# Altium PCB JacdacRHTemp 18.PcbDoc
Units mm, origin at the board's own origin, x right, y up, seen from the top; angles counter-clockwise.
Board outline 10.15 x 28.22 mm, 2 copper layers (Top Layer, Bottom Layer), stack 1.525 mm thick; 25 components, 17 nets, 89 pads, 12 vias.
Unrouted connection lines stored in the file: 14.
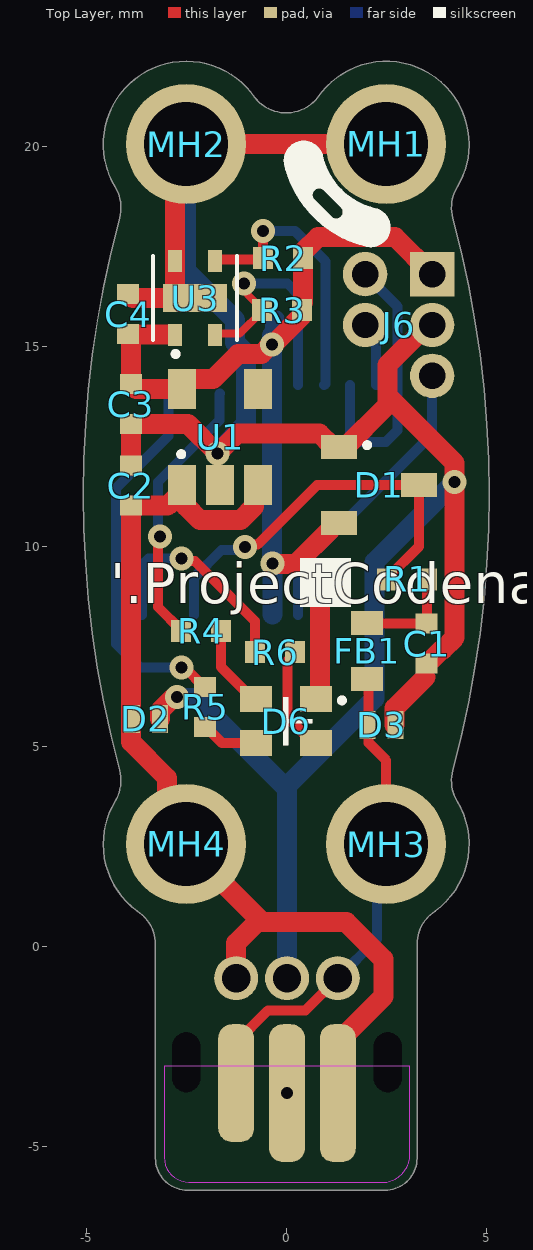
[diagram p0: Top Layer view]
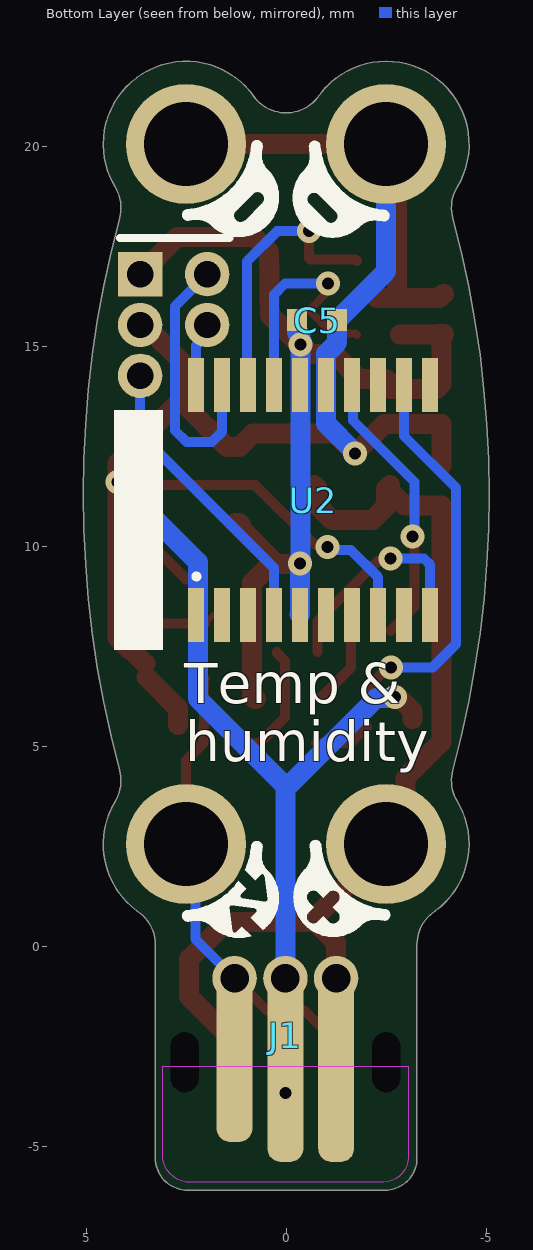
[diagram p1: Bottom Layer view, seen from below]

## Layer stack, top to bottom
Top Solder: solder mask 0.0102, Solder Resist, Dk 3.5
Top Layer: signal copper 0.0356
Dielectric 1: core 1.454, FR-4, Dk 4.2
Bottom Layer: signal copper 0.0356
Bottom Solder: solder mask 0.0102, Solder Resist, Dk 3.5

## Board outline
-4.574,2.554 ccw(c-2.493,2.554) -3.725,0.877 cw(c-4.268,0.04) -3.27,0.039 -3.27,-5.3 ccw(c-2.471,-5.301) -2.47,-6.1 2.47,-6.1 ccw(c2.471,-5.301) 3.27,-5.3 3.27,0.039 cw(c4.268,0.04) 3.725,0.877 ccw(c2.5,2.549) 4.275,3.62 cw(c5.132,4.136) 4.166,4.394 ccw(c-21.654,11.3) 4.166,18.205 cw(c5.132,18.463) 4.275,18.979 ccw(c2.5,20.05) 4.573,20.02 4.573,20.05 ccw(c2.501,20.051) 0.783,21.21 cw(c0.001,21.833) -0.783,21.212 ccw(c-2.5,20.05) -2.487,22.123 -2.5,22.123 ccw(c-2.5,20.049) -3.334,21.948 ccw(c-2.5,20.05) -4.275,18.98 cw(c-5.132,18.464) -4.166,18.205 ccw(c21.634,11.3) -4.167,4.398 cw(c-5.133,4.14) -4.276,3.624 ccw(c-2.497,2.552)

## Design rules (kind name [scope] priority, off if disabled: settings)
AssemblyTestPointUsage [All] p1: valid=2
BoardOutlineClearance [All] p1: gap=0.3 ignorepadtopadclearanceinfootprint=FALSE except(0: Arc-SplitContinuation Track-SplitContinuation SMDPad-OutlineEdge SMDPad-SplitContinuation THPad-OutlineEdge THPad-SplitContinuation Via-SplitContinuation Fill-SplitContinuation Poly-SplitContinuation Region-OutlineEdge Region-SplitContinuation Text-SplitContinuation; 0.2: Track-OutlineEdge Text-OutlineEdge)
Clearance [All] p1: gap=0.125 ignorepadtopadclearanceinfootprint=FALSE except(0: Arc-Hole Track-Hole SMDPad-Hole THPad-Hole Via-Hole Fill-Hole Poly-Hole Region-Hole Text-Hole)
ComponentClearance [All] p1: gap=0.2 collisioncheckmode=3 verticalgap=0.2 showdistances=FALSE
DiffPairsRouting [All] p1: maxlimit=2 minlimit=0.15 mostfreqgap=0.15 toplayer_minwidth=0.15 toplayer_maxwidth=2 toplayer_prefwidth=0.15 bottomlayer_minwidth=0.15 bottomlayer_maxwidth=2 bottomlayer_prefwidth=0.15 substack1={CB9D278B-8BF5-444A-AAF4-837A2A9DF42D} toplayer_{cb9d278b-8bf5-444a-aaf4-837a2a9df42d}_minwidth=0.381 toplayer_{cb9d278b-8bf5-444a-aaf4-837a2a9df42d}_maxwidth=0.381 toplayer_{cb9d278b-8bf5-444a-aaf4-837a2a9df42d}_prefwidth=0.381 bottomlayer_{cb9d278b-8bf5-444a-aaf4-837a2a9df42d}_minwidth=0.381 bottomlayer_{cb9d278b-8bf5-444a-aaf4-837a2a9df42d}_maxwidth=0.381 bottomlayer_{cb9d278b-8bf5-444a-aaf4-837a2a9df42d}_prefwidth=0.381 substack2={826B8647-A721-4255-895A-19F9591B9CD1} toplayer_{826b8647-a721-4255-895a-19f9591b9cd1}_minwidth=0.381 toplayer_{826b8647-a721-4255-895a-19f9591b9cd1}_maxwidth=0.381 toplayer_{826b8647-a721-4255-895a-19f9591b9cd1}_prefwidth=0.381 bottomlayer_{826b8647-a721-4255-895a-19f9591b9cd1}_minwidth=0.381 bottomlayer_{826b8647-a721-4255-895a-19f9591b9cd1}_maxwidth=0.381 bottomlayer_{826b8647-a721-4255-895a-19f9591b9cd1}_prefwidth=0.381 substack3={E64FCAF4-1BC8-437D-B1E0-0E5F2DC0F59E} toplayer_{e64fcaf4-1bc8-437d-b1e0-0e5f2dc0f59e}_minwidth=0.381 toplayer_{e64fcaf4-1bc8-437d-b1e0-0e5f2dc0f59e}_maxwidth=0.381 toplayer_{e64fcaf4-1bc8-437d-b1e0-0e5f2dc0f59e}_prefwidth=0.381 bottomlayer_{e64fcaf4-1bc8-437d-b1e0-0e5f2dc0f59e}_minwidth=0.381 bottomlayer_{e64fcaf4-1bc8-437d-b1e0-0e5f2dc0f59e}_maxwidth=0.381 bottomlayer_{e64fcaf4-1bc8-437d-b1e0-0e5f2dc0f59e}_prefwidth=0.381 substack4={E61CE66C-507C-4E1E-8E83-C905434AFC1C} toplayer_{e61ce66c-507c-4e1e-8e83-c905434afc1c}_minwidth=0.381 toplayer_{e61ce66c-507c-4e1e-8e83-c905434afc1c}_maxwidth=0.381 toplayer_{e61ce66c-507c-4e1e-8e83-c905434afc1c}_prefwidth=0.381 bottomlayer_{e61ce66c-507c-4e1e-8e83-c905434afc1c}_minwidth=0.381 bottomlayer_{e61ce66c-507c-4e1e-8e83-c905434afc1c}_maxwidth=0.381 bottomlayer_{e61ce66c-507c-4e1e-8e83-c905434afc1c}_prefwidth=0.381 maxuncoupledlength=25
FabricationTestPointUsage [All] p1: valid=2 allowmultiple=FALSE
HoleSize [All] p1: absolutevalues=TRUE maxlimit=2.54 minlimit=0.2 maxpercent=80.000 minpercent=20.000
MinimumSolderMaskSliver [All] p1: minsoldermaskwidth=0.005
PlaneClearance [All] p1: clearance=0.3
PlaneConnect [All] p1: planeconnectstyle=Relief reliefexpansion=0.5 reliefentries=4 reliefconductorwidth=0.2 reliefairgap=0.3
PolygonConnect "PolygonConnect GND" [isVIA] p1: connectstyle=Relief reliefconductorwidth=0.2 reliefentries=4 polygonreliefangle="90 Angle" airgapwidth=0.2
PolygonConnect [All] p2: connectstyle=Relief reliefconductorwidth=0.2 reliefentries=4 polygonreliefangle="90 Angle" airgapwidth=0.2
RoutingVias [All] p1: holewidth=0.3 width=0.6 viastyle="Through Hole" minholewidth=0.3 minwidth=0.6 maxholewidth=0.3 maxwidth=0.8
SilkToSilkClearance [All] p1: silktosilkclearance=0.001
SilkToSolderMaskClearance [IsPad] p1: minsilkscreentomaskgap=0.05 clearancetoexposedcopper=TRUE
SolderMaskExpansion [All] p1: expansion=0.075 istentingtop=FALSE
Width [All] p1: maxlimit=2 minlimit=0.15 preferedwidth=0.15 substack1={CB9D278B-8BF5-444A-AAF4-837A2A9DF42D} substack2={826B8647-A721-4255-895A-19F9591B9CD1} substack3={E64FCAF4-1BC8-437D-B1E0-0E5F2DC0F59E} substack4={E61CE66C-507C-4E1E-8E83-C905434AFC1C} minimp=50.000000 maximp=50.000000 favimp=50.000000
20 further rules are at their usual default settings.

## Components (designator, comment, footprint, x,y, rotation, side; value= is the part's Value field where it differs from the comment)
C1 "CL05C330JB5NNNC" "C0402_0.55MM - without outline" 3.512,7.565 r90 top
C2 "CL05A105KP5NNNC" "C0402_0.55MM - without outline" -3.881,11.513 r270 top
C3 "CL05A105KP5NNNC" "C0402_0.55MM - without outline" -3.881,13.55 r90 top
C4 "CL05A105KP5NNNC" "C0402_0.55MM - without outline" -3.95,15.8 r270 top
C5 "CL05A105KP5NNNC" "C0402_0.55MM - without outline" -0.775,15.65 r0 bottom
D1 "BAT54S" "NXP-BAT54S-TO-236AB - WITHOUT OUTLINE" 2.324,11.525 r0 top
D2 "RCLAMP0521P-N" "TVS 0402 - L" -3.509,5.683 r0 top
D3 "RCLAMP0521P-N" "TVS 0402 - L" 2.383,5.535 r0 top
D6 "TZ-P4-1615RGBTCA1-0.55T" TZ-P4-1615RGBTCA1-0.55T 0,5.625 r180 top
FB1 "TDK MPZ1608S102ATA00" "TDK MPZ1608 0.8mm - without outline" 2.025,7.376 r90 top
J1 "3 pin JACDAC edge connector" JACDAC_EDGE_CONNECTOR_NO_TRACES 0.02,-0.25 r0 bottom
J6 "Hack Connect Mini 1.27 mm pitch 2-row" HACK_CONNECT_MINI_5_X_1_27 3.65,16.8 r180 top
MH1 "MH_5.0MMK_3.0MMC_2.1MMD_PTH" MH_5.0MMK_3.0MMC_2.1MMD_PTH 2.5,20.05 r0 top
MH2 "MH_5.0MMK_3.0MMC_2.1MMD_PTH" MH_5.0MMK_3.0MMC_2.1MMD_PTH -2.5,20.05 r0 top
MH3 "MH_5.0MMK_3.0MMC_2.1MMD_PTH" MH_5.0MMK_3.0MMC_2.1MMD_PTH 2.5,2.55 r90 top
MH4 "MH_5.0MMK_3.0MMC_2.1MMD_PTH" MH_5.0MMK_3.0MMC_2.1MMD_PTH -2.5,2.55 r0 top
R1 "RC0402FR-07220RL" "R0402 - Without outline" 3.023,9.171 r0 top
R2 "10k" "R0402 - Without outline" -0.075,17.2 r180 top
R3 "10k" "R0402 - Without outline" -0.1,15.9 r180 top
R4 "RC0402FR-0730RL" "R0402 - WITHOUT OUTLINE" -2.125,7.875 r180 top
R5 "RC0402FR-0730RL" "R0402 - WITHOUT OUTLINE" -2.025,5.975 r90 top
R6 "RC0402FR-07150RL" "R0402 - Without outline" -0.275,7.35 r180 top
U1 "LDO 3.3V/300 mA" "ON_SEMI-SOT23-5 - WITHOUT OUTLINE" -1.65,12.725 r90 top
U2 "STM32F030F4P6" "20-TSSOP - WITHOUT OUTLINE" -0.675,11.15 r90 bottom
U3 "SHTC3" SHTC3_4_WDFN -2.275,16.2 r90 top

## Footprints (in the part's own frame and the unit in brackets; to place one, negate y for a bottom-side part, rotate by r counter-clockwise, add the part's x,y. Pads: shape width x height; smd on the part's side, far side on the other; paste and mask are expansions set on the pad)
"20-TSSOP - WITHOUT OUTLINE" [mm]
  rect 1.35x0.4 smd: 1(-2.875,2.925) 2(-2.875,2.275) 3(-2.875,1.625) 4(-2.875,0.975) 5(-2.875,0.325) 6(-2.875,-0.325) 7(-2.875,-0.975) 8(-2.875,-1.625) 9(-2.875,-2.275) 10(-2.875,-2.925) 11(2.875,-2.925) 12(2.875,-2.275) 13(2.875,-1.625) 14(2.875,-0.975) 15(2.875,-0.325) 16(2.875,0.325) 17(2.875,0.975) 18(2.875,1.625) 19(2.875,2.275) 20(2.875,2.925)
  silkscreen extent -1.95,2.87 -1.86,2.97, body extent -3.3,-3.3 3.3,3.3, height 1.2
"C0402_0.55MM - without outline" [mm]
  rect 0.5x0.55 smd: 1(-0.5,0) 2(0.5,0)
  body extent -0.5,-0.25 0.5,0.25, height 0.55
HACK_CONNECT_MINI_5_X_1_27 [mm]
  rect 1.11x1.11 hole 0.66: 1(0,0)
  round 1.11 hole 0.66: 2(1.676,0) 3(0,1.27) 4(1.676,1.27) 5(0,2.54)
JACDAC_EDGE_CONNECTOR_NO_TRACES [mm] "JacDac 3 pin connector with no traces"
  rrect78% 0.9x2.95 smd far side paste-1 mask+0: 1(-1.27,3.175)
  round 1.11 / inner round 0.71 / far side round 1.1 hole 0.71 paste-0.254 mask+0: 1(1.27,0.55) 2(0,0.55) 3(-1.27,0.55)
  rrect78% 0.9x4.3 smd paste-1 mask+0: 1(1.27,2.5)
  rrect78% 0.9x4.8 smd paste-1 mask+0: 2(0,2.75) 3(-1.27,2.75)
  rrect78% 0.9x3.45 smd far side paste-1 mask+0: 2(0,3.425) 3(1.27,3.425)
  round 0 hole 0.7 slot 1.5 at 90 deg unplated: ""(-2.52,2.65) ""(2.52,2.65)
  Top Layer keep-out region: -3.075,2.75 -3.07,5.033 -2.987,5.341 -2.761,5.567 -2.453,5.65 -2.453,5.65 2.27,5.65 2.545,5.635 2.794,5.516 2.978,5.31 3.07,5.05 3.07,5.05 3.07,2.75
  Bottom Layer lines w0.2: -1.27,0.85 -1.126,0.85
  Bottom Layer keep-out region: -3.07,2.75 -3.07,5.033 -3.023,5.269 -2.889,5.469 -2.689,5.603 -2.453,5.65 -2.453,5.65 2.27,5.65 2.545,5.635 2.794,5.516 2.978,5.31 3.07,5.05 3.07,5.05 3.07,2.75
MH_5.0MMK_3.0MMC_2.1MMD_PTH [mm] "Mounting Hole 5.0mm clearance, 3.1 annualar ring and 2.1mm PTH"
  round 3 hole 2.1 mask+0.05: 1(0,0)
"NXP-BAT54S-TO-236AB - WITHOUT OUTLINE" [mm] "SOT23, 3-Leads, Body 2.90x2.30mm, Pitch 0.95mm, IPC Medium Density"
  rect 0.9x0.6 smd: 1(-1,0.95) 2(-1,-0.95) 3(1,0)
  silkscreen extent -0.35,0.95 -0.25,1.05, body extent -1.32,-1.5 1.32,1.5, height 1.12
"ON_SEMI-SOT23-5 - WITHOUT OUTLINE" [mm]
  rect 1x0.7 smd: 1(-1.2,0.95) 2(-1.2,0) 3(-1.2,-0.95) 4(1.2,-0.95) 5(1.2,0.95)
  silkscreen extent -0.47,0.92 -0.38,1.02, body extent -1.5,-1.57 1.5,1.58, height 1.1
"R0402 - Without outline" [mm]
  rect 0.5x0.55 smd: 1(-0.5,0) 2(0.5,0)
  body extent -0.5,-0.25 0.5,0.25, height 0.35
"R0402 - WITHOUT OUTLINE" [mm]
  rect 0.5x0.55 smd: 1(-0.5,0) 2(0.5,0)
  body extent -0.5,-0.25 0.5,0.25, height 0.35
SHTC3_4_WDFN [mm] "Humidity Temperature Sensor 0 ~ 100% RH I²C ±2% RH 8s Surface Mount"
  rect 0.55x0.35 smd paste-0.5 mask+0.05: 1(-0.925,0.5) 2(-0.925,-0.5)
  rect 0.55x0.35 smd paste-0.6 mask+0.05: 3(0.925,-0.5)
  rect 0.55x0.35 smd paste-0.2 mask+0.05: 4(0.925,0.5)
  rect 0.7x1.6 smd paste-0.1 mask+0.05: 5(0,0)
  rect 0.45x0.35 on Top Paste paste-0.6 mask+0.05: ""(-0.875,-0.5) ""(-0.875,0.5) ""(0.875,-0.5) ""(0.875,0.5)
  silkscreen extent -1.44,-1.05 1.05,1.05, body extent -1,-1 1,1, height 0.75
"TDK MPZ1608 0.8mm - without outline" [mm]
  rect 0.6x0.8 smd paste-0.1: 1(-0.7,0) 2(0.7,0)
  body extent -0.8,-0.4 0.8,0.4, height 0.8
"TVS 0402 - L" [mm] "TVS 0402 RoHS"
  rect 0.4x0.7 smd paste-0.038 mask+0.05: 1(-0.35,0) 2(0.35,0)
  body extent -0.5,-0.3 0.5,0.3, height 0.5
TZ-P4-1615RGBTCA1-0.55T [mm] "1615 Light Emitting Diodes (LED) RoHS"
  rect 0.8x0.65 smd mask+0.05: 1(-0.75,-0.55) 2(-0.75,0.55) 3(0.75,0.55) 4(0.75,-0.55)
  silkscreen extent -1.44,-0.6 0.07,0.6, body extent -0.8,-0.75 0.8,0.75, height 0.55

## Part data
C1: "CAP CER 33PF 50V C0G/NP0 0402", Capacitance=33pF, Case Code (Imperial)=0402, Case Code (Metric)=1005, Dielectric=C0G, Manufacturer=Samsung, Max Operating Temperature=125°C, Min Operating Temperature=-55°C, Package Quantity=1, Supplier Part Number 1=1276-1272-1-ND, Temperature Coefficient=300ppm/°C, Tolerance=5%, Voltage=50V, Case/Package=0402, Category="Ceramic Capacitors", ComponentLink1Description="Online datasheet", ComponentLink1URL=https://datasheet.ciiva.com/15195/getdatasheetpartid-355282-15195687.pdf, Construction=Flat, Contact Plating=Tin, Depth=0.5mm, Height=0.5mm, Lead Free="Lead Free", Length=1mm, Manufacturer Part Number=CL05C330JB5NNNC, Material=Ceramic, Mount="Surface Mount", Packaging="Tape and Reel", Pricing 1="1=0.10000, 10=0.02300, 50=0.01260, 100=0.01040, 500=0.00740, 1000=0.00582, 2500=0.00529, 5000=0.00487 (USD)", Pricing 2="1=0.12500, 25=0.02900, 100=0.01300, 250=0.01100, 500=0.00900, 1000=0.00600 (USD)", Pricing 3="1=0.10000, 10=0.01400, 50=0.01400, 100=0.01100, 1000=0.00600, 10000=0.00400 (USD)", Pricing 4="150=0.01120, 500=0.00860, 2500=0.00640, 5000=0.00550 (GBP)", Radiation Hardening=No, RoHS=Yes, RoHS Compliant=Yes, Series=CL, Stock 1=5436088, Stock 2=45340, Stock 3=8877, Stock 4=10934, Supplier 1=Digi-Key, Supplier 2=Newark, Supplier 3=Mouser, Supplier 4=Farnell, Supplier Part Number 2=82AC9259, Supplier Part Number 3=187-CL05C330JB5NNNC, Supplier Part Number 4=3013373RL, Thickness=0.022inch, Voltage Rating=50V, Voltage Rating (DC)=50V, Width=0.02inch
C2 C3 C4 C5: "CAP CER 1UF 10V X5R 0402", Capacitance=1µF, Case Code (Imperial)=0402, Case Code (Metric)=1005, Dielectric=X5R, Manufacturer=Samsung, Max Operating Temperature=85°C, Min Operating Temperature=-55°C, Package Quantity=1, Supplier Part Number 1=1276-1076-1-ND, Tolerance=10%, Voltage Rating=10V, Case/Package=0402, Category=Capacitors, Checked=?, ComponentLink1Description="Online datasheet", ComponentLink1URL=https://datasheet.ciiva.com/15195/getdatasheetpartid-358390-15195630.pdf, Contact Plating=Tin, Created=DG, Depth=0.5mm, Height=0.5mm, Length=1mm, Manufacturer Part Number=CL05A105KP5NNNC, Material=Ceramic, Mount="Surface Mount", Packaging="Tape and Reel", Pricing 1="1=0.10000, 10=0.03900, 50=0.02100, 100=0.01720, 500=0.01228, 1000=0.00965, 2500=0.00877, 5000=0.00807 (USD)", Pricing 2="1=0.10000, 10=0.04200, 100=0.01800, 500=0.01300, 1000=0.01000, 2500=0.00900 (USD)", Pricing 3="10=0.02450, 100=0.02000, 500=0.01310, 2500=0.00920, 5000=0.00810, 10000=0.00640, 50000=0.00490 (GBP)", Radiation Hardening=No, RoHS=Yes, Stock 1=5705569, Stock 2=928941, Stock 3=53670, Supplier 1=Digi-Key, Supplier 2=Mouser, Supplier 3=Farnell, Supplier Part Number 2=187-CL05A105KP5NNNC, Supplier Part Number 3=3013329, Thickness=0.022inch, Width=0.02inch
D1: "DIODE ARRAY SCHOTTKY 30V SOT23", Manufacturer=Nexperia, Manufacturer Part Number=BAT54S,235, Supplier Part Number 1=1727-1868-1-ND, Category="Rectifier Diodes", ComponentLink1Description="NXP datasheet online", ComponentLink1URL=https://assets.nexperia.com/documents/data-sheet/BAT54_SER.pdf, Pricing 1="1=0.13000, 10=0.11900, 100=0.05610, 500=0.03326, 1000=0.02185, 5000=0.02138 (USD)", RoHS=No, Stock 1=14011, Supplier 1=Digi-Key, Supplier 2=Mouser, Supplier 3=RSComponents, Supplier Part Number 2=771-BAT54S235, Supplier Part Number 3=1707990
D2 D3: "Bidirectional 5V (Max) 6V 16V 3.5A (8/20us) 0402 TVS RoHS", Manufacturer="Born Semiconductor", Package=0402, Supplier1 Part Number=C316043, Checked By=?, ComponentLink1Description="Online datasheet", ComponentLink1URL=https://datasheet.lcsc.com/szlcsc/Bourne-Semicon-Shenzhen-RCLAMP0521P-N_C316043.pdf, Created By="D Gakure", Manufacturer Part Number=RCLAMP0521P-N, Supplier1=LCSC
D6: "1615 Light Emitting Diodes (LED) RoHS", Manufacturer=TUOZHAN, Package=1615, Supplier 1 Part Number=C779813, Category=Optoelectronics, Checked By=?, ComponentLink1Description="Online datasheet", ComponentLink1URL=https://datasheet.lcsc.com/szlcsc/2009041238_TUOZHAN-TZ-P4-1615RGBTCA1-0-55T_C779813.pdf, Created By="D. Gakure", Manufacturer Part Number=TZ-P4-1615RGBTCA1-0.55T, Packaging="Tape & Reel (TR)", RoHS="RoHS Compliant", Size / Dimension=1.6x1.5mm, Supplier 1=LCSC
FB1: "0603 1k@100MHz 0.8A chip", Case Code (Imperial)=0603, Case Code (Metric)=1608, Current Rating=800mA, DC Resistance (DCR)=300mR, Manufacturer=TDK, Manufacturer Part Number=MPZ1608S102ATA00, Package Quantity=4000, Supplier Part Number 1=445-8694-1-ND, Tolerance=25%, Case/Package=0603, ComponentLink2Description="datasheet online", ComponentLink2URL=https://www.mouser.co.uk/datasheet/2/400/eads_commercial_power_mpz1608_en-923650.pdf, ComponentLink3Description=datasheet, ComponentLink3URL="Y:\System\Altium\Libraries 2014\TDK\Datasheets\eads_commercial_power_mpz1608_en-923650.pdf", Core Material=Ferrite, Height=0.037inch, Impedance="1kR @ 100MHz", Length=0.063inch, Max DC Current=800mA, Mount="Surface Mount", Packaging="Tape and Reel", Pricing 1="1=0.1, 10=0.079, 25=0.0716, 50=0.0644, 100=0.0472, 250=0.03432, 500=0.03146, 1000=0.02717 (USD)", Stock 1=113542, Supplier 1=Digi-Key, Supplier 2=Mouser, Supplier Part Number 2=810-MPZ1608S102ATA00, Width=0.031inch
J1: library part "Jacdac edge connector", "3 pin Jacdac edge connector 1.27mm pitch", Manufacturer Part Number=JACDAC_EDGE_CONNECTOR, Checked By=?, ComponentLink1Description="Yuliang JACDAC cable connector drawing online", ComponentLink1URL=https://github.com/microsoft/jacdac-mdk/blob/main/connector/JACDAC-Connector-by-Yuliang-2020-11-28.pdf, ComponentLink2Description="JACDAC PCB edge connector spec onlin", ComponentLink2URL=https://github.com/microsoft/jacdac-mdk/blob/main/connector/JACDAC_PCB_Edge_Connector_Drawing_JD-PEC-01_rev_01.pdf, Created By="D. Gakure", PCB Type="1.6mm FR4"
J6: library part HACK_CONNECT_MINI
MH1 MH2 MH3 MH4: "Mounting Hole 5.0mm keepout, 3.0mm annualar ring and 2.1mm Drill PTH"
R1: "RES SMD 220 OHM 1% 1/16W 0402", Case Code (Imperial)=0402, Case Code (Metric)=1005, Manufacturer=Yageo, Max Operating Temperature=155°C, Max Power Dissipation=63mW, Min Operating Temperature=-55°C, Package Quantity=1, Power Rating=62.5mW, Resistance=220R, Resistor Type="Thick Film", Supplier Part Number 1=311-220LRCT-ND, Temperature Coefficient=100ppm/°C, Tolerance=1%, Voltage Rating=50V, Case/Package=0402, Category=Resistors, Checked=?, ComponentLink1Description=https://datasheet.ciiva.com/11819/0900766b80c66297-11819466.pdf?src-supplier=RSComponents, ComponentLink1URL=https://datasheet.ciiva.com/11819/0900766b80c66297-11819466.pdf?src-supplier=RSComponents, ComponentLink2Description=https://datasheet.ciiva.com/2453/pyu-r-int-thick-7-2453460.pdf?src-supplier=Digi-Key, ComponentLink2URL=https://datasheet.ciiva.com/2453/pyu-r-int-thick-7-2453460.pdf?src-supplier=Digi-Key, ComponentLink3Description=https://datasheet.ciiva.com/2453/pyu-r-int-thick-7-2453461.pdf?src-supplier=Digi-Key, ComponentLink3URL=https://datasheet.ciiva.com/2453/pyu-r-int-thick-7-2453461.pdf?src-supplier=Digi-Key, ComponentLink4Description=https://datasheet.ciiva.com/2453/pyu-r-int-thick-7-2453462.pdf?src-supplier=Digi-Key, ComponentLink4URL=https://datasheet.ciiva.com/2453/pyu-r-int-thick-7-2453462.pdf?src-supplier=Digi-Key, ComponentLink5Description=https://datasheet.ciiva.com/16746/pyu-rc0402-51-rohs-l-6-r-16746831.pdf?src-supplier=Future+Electronics, ComponentLink5URL=https://datasheet.ciiva.com/16746/pyu-rc0402-51-rohs-l-6-r-16746831.pdf?src-supplier=Future+Electronics, Created=D.G, Depth=0.5mm, Features="Moisture Resistant", Height=0.016inch, Lead Free="Lead Free", Length=1mm, Manufacturer Part Number=RC0402FR-07220RL, Military Standard=Not, Number of Pins=2, Number of Terminations=2, Packaging="Tape and Reel", Pricing 1="1=0.10000, 10=0.01400, 100=0.00580, 1000=0.00262, 2500=0.00228, 5000=0.00188 (USD)", Pricing 2="1=0.10000, 10=0.01200, 100=0.00400, 1000=0.00400, 2500=0.00400, 10000=0.00300 (USD)", Pricing 3="1=0.08130, 25=0.01210, 100=0.01120, 250=0.01030, 500=0.00900 (GBP)", REACH SVHC="No SVHC", RoHS=Yes, Stock 1=1286042, Stock 2=324625, Stock 3=18234, Supplier 1=Digi-Key, Supplier 2=Mouser, Supplier 3=Farnell, Supplier Part Number 2=603-RC0402FR-07220RL, Supplier Part Number 3=2147864, Termination=SMD/SMT, Voltage Rating (DC)=50V, Width=0.02inch
R2 R3: library part RC0402FR-0710KL, "RES SMD 10K OHM 1% 1/16W 0402", Case Code (Imperial)=0402, Case Code (Metric)=1005, Manufacturer=Yageo, Max Operating Temperature=155°C, Min Operating Temperature=-55°C, Power Rating=62.5mW, Resistance=10kR, Resistor Type="Thick Film", Supplier Part Number 1=311-10.0KLRCT-ND, Temperature Coefficient=100ppm/°C, Tolerance=1%, Voltage Rating=50V, Case/Package=0402, Category=Resistors, Checked=?, ComponentLink1Description=https://datasheet.ciiva.com/7660/38568-7660787.pdf?src-supplier=Element14, ComponentLink1URL=https://datasheet.ciiva.com/7660/38568-7660787.pdf?src-supplier=Element14, ComponentLink2Description=https://datasheet.ciiva.com/7849/1784430-7849813.pdf?src-supplier=Element14, ComponentLink2URL=https://datasheet.ciiva.com/7849/1784430-7849813.pdf?src-supplier=Element14, ComponentLink3Description=https://datasheet.ciiva.com/7849/1686128-7849814.pdf?src-supplier=Element14, ComponentLink3URL=https://datasheet.ciiva.com/7849/1686128-7849814.pdf?src-supplier=Element14, ComponentLink4Description=https://datasheet.ciiva.com/7849/1784430-7849815.pdf?src-supplier=Element14, ComponentLink4URL=https://datasheet.ciiva.com/7849/1784430-7849815.pdf?src-supplier=Element14, ComponentLink5Description=https://datasheet.ciiva.com/22747/1018594-22747512.pdf?src-supplier=Element14, ComponentLink5URL=https://datasheet.ciiva.com/22747/1018594-22747512.pdf?src-supplier=Element14, ComponentLink6Description=https://datasheet.ciiva.com/12667/pyu-rc0402-51-rohs-l-6-r-12667067.pdf?src-supplier=Mouser, ComponentLink6URL=https://datasheet.ciiva.com/12667/pyu-rc0402-51-rohs-l-6-r-12667067.pdf?src-supplier=Mouser, ComponentLink7Description=https://datasheet.ciiva.com/7983/1018594-7983486.pdf?src-supplier=Element14, ComponentLink7URL=https://datasheet.ciiva.com/7983/1018594-7983486.pdf?src-supplier=Element14, Created=DG, Depth=0.5mm, Height=0.32mm, Lead Free="Lead Free", Lead Pitch=0.2mm, Length=1mm, Manufacturer Part Number=RC0402FR-0710KL, Military Standard=Not, Number of Pins=2, Number of Terminations=2, Packaging="Tape and Reel", Pricing 1="1=0.10000, 10=0.01400, 100=0.00580, 1000=0.00262, 2500=0.00228, 5000=0.00188 (USD)", Pricing 2="1=0.10000, 10=0.01300, 100=0.00400, 1000=0.00300, 2500=0.00300, 10000=0.00200 (USD)", Pricing 3="10000=0.00350 (GBP)", REACH SVHC="No SVHC", RoHS=Yes, Stock 1=40173593, Stock 2=23672167, Stock 3=370000, Supplier 1=Digi-Key, Supplier 2=Mouser, Supplier 3=Farnell, Supplier Part Number 2=603-RC0402FR-0710KL, Supplier Part Number 3=2363463, Termination=SMD/SMT, Voltage Rating (DC)=50V, Width=0.5mm, Working Voltage=50V
R4 R5: "RES SMD 30 OHM 1% 1/16W 0402", Case Code (Imperial)=0402, Case Code (Metric)=1005, Manufacturer=Yageo, Max Operating Temperature=155°C, Max Power Dissipation=63mW, Min Operating Temperature=-55°C, Resistance=30R, Resistance Tolerance=1%, Resistor Type="Thick Film", Supplier Part Number 1=311-30LRCT-ND, Temperature Coefficient=100ppm/°C, Voltage Rating=50V, Case/Package=0402, Category="Chip SMD Resistors", Checked By=?, ComponentLink1Description="Online datasheet", ComponentLink1URL=https://datasheet.ciiva.com/7849/1018594-7849958.pdf, Construction=Rectangular, Contact Plating=Tin,Matte, Created By="D. Gakure", Depth=0.5mm, Features="Moisture Resistant", Height=0.35mm, Lead Free="Lead Free", Length=1mm, Manufacturer Part Number=RC0402FR-0730RL, Military Standard=Not, Number of Terminations=2, Packaging="Tape and Reel", Power Rating=63mW, Pricing 1="1=0.10000, 10=0.01400, 100=0.00580, 1000=0.00260, 2500=0.00226, 5000=0.00186 (USD)", Pricing 2="1=0.10000, 10=0.01200, 50=0.01200, 100=0.00400, 1000=0.00400, 10000=0.00300 (USD)", Pricing 3="10=0.01210, 100=0.00420, 500=0.00370, 2500=0.00280, 5000=0.00250, 10000=0.00230, 50000=0.00150 (GBP)", REACH SVHC=Unknown, RoHS=Yes, RoHS Compliant=Yes, Series=RC, Size Code=0402, Stock 1=2973, Stock 2=41804, Stock 3=4422, Supplier 1=Digi-Key, Supplier 2=Mouser, Supplier 3=Farnell, Supplier Part Number 2=603-RC0402FR-0730RL, Supplier Part Number 3=1458775, Termination=SMD/SMT, Tolerance=1%, Voltage Rating (DC)=50V, Width=0.5mm
R6: "RES SMD 150 OHM 1% 1/16W 0402", Case Code (Imperial)=0402, Case Code (Metric)=1005, Manufacturer=Yageo, Max Operating Temperature=155°C, Max Power Dissipation=63mW, Min Operating Temperature=-55°C, Package Quantity=1, Power Rating=62.5mW, Resistance=150R, Resistance Tolerance=1%, Resistor Type="Thick Film", Supplier Part Number 1=311-150LRCT-ND, Temperature Coefficient=100ppm/°C, Voltage Rating=50V, Case/Package=0402, Category="Chip SMD Resistors", Checked By=?, ComponentLink1Description="ine datasheet", ComponentLink1URL=https://datasheet.ciiva.com/11808/0900766b80c66297-11808422.pdf, Construction=Rectangular, Created By="D. Gakure", Depth=0.5mm, Features="Moisture Resistant", Height=0.016inch, Lead Free="Lead Free", Length=1mm, Manufacturer Part Number=RC0402FR-07150RL, Military Standard=Not, Number of Terminations=2, Packaging="Tape and Reel", Pricing 1="1=0.10000, 10=0.01400, 100=0.00580, 1000=0.00260, 2500=0.00226, 5000=0.00186 (USD)", Pricing 2="1=0.10000, 10=0.01200, 50=0.01200, 100=0.00400, 1000=0.00400, 10000=0.00300 (USD)", Pricing 3="10000=0.00270, 50000=0.00200 (GBP)", REACH SVHC="No SVHC", RoHS=Yes, RoHS Compliant=Yes, Series=RC, Stock 1=5214533, Stock 2=582717, Stock 3=880000, Supplier 1=Digi-Key, Supplier 2=Mouser, Supplier 3=Farnell, Supplier Part Number 2=603-RC0402FR-07150RL, Supplier Part Number 3=2421893, Technology="THICK FILM", Termination=SMD/SMT, Tolerance=1%, Width=0.02inch, Working Voltage=50V
U1: library part NCP114BSN330T1G, "CMOS Low Dropout Regulator (LDO), 300 mA 3.3V, Non-Active Discharge, TSOP5", Case/Package=TSOP, Manufacturer="ON Semiconductor", Max Input Voltage=5.5V, Max Operating Temperature=85°C, Max Output Current=300mA, Min Input Voltage=1.7V, Min Operating Temperature=-40°C, Output Voltage=3.3V, Quiescent Current=50uA, Supplier Part Number 1=NCP114BSN330T1GOSCT-ND, Accuracy=2%, Category="Voltage Regulators - Linear", ComponentLink1Description="Datasheet (online)", ComponentLink1URL=http://www.farnell.com/datasheets/2118270.pdf?src-supplier=Farnell, Lead Free="Lead Free", Manufacturer Part Number=NCP114BSN330T1G, Mount="Surface Mount", Number of Outputs=1, Number of Pins=5, Output Type=Fixed, Polarity=Positive, Pricing 1="1=0.45000, 10=0.33700, 25=0.29440, 100=0.19060, 250=0.15780, 500=0.12624, 1000=0.09679 (USD)", RoHS=Yes, RoHS Compliant=Yes, Stock 1=4067, Supplier 1=Digi-Key, Supplier 2=Mouser, Supplier 3=RSComponents, Supplier Part Number 2=863-NCP114BSN330T1G, Supplier Part Number 3=1263179
U2: library part "ST STM32F030F4P6", "ARM Cortex-M0 STM32F0 Microcontroller IC 32-Bit 48MHz 16KB (16K x 8) FLASH", Case/Package=TSSOP, Frequency=48MHz, Manufacturer=STMicroelectronics, Max Operating Temperature=85°C, Max Power Dissipation=182mW, Max Supply Voltage=3.6V, Min Operating Temperature=-40°C, Min Supply Voltage=2.4V, Package Quantity=74, Supplier Part Number 1=2393635, Categories="Integrated Circuits", Category=Microcontrollers, Checked=?, Checked By=?, ComponentLink1Description="Online datasheet", ComponentLink1URL=https://datasheet.ciiva.com/29720/dm00088500-29720640.pdf, Contact Plating=Gold, Core Architecture=ARM, Created=DG, Created By="D. Gakure", Data Bus Width=32b, Height=1.05mm, Interface=I2C,SPI,UART,USART, Lead Free="Lead Free", Length=6.6mm, Manufacturer Part Number=STM32F030F4P6, Max Frequency=48MHz, Memory Size=16KB, Memory Type=FLASH, Number of ADC Channels=16, Number of I2C Channels=1, Number of I/Os=15, Number of Pins=20, Number of Programmable I/O=15, Number of PWM Channels=6, Number of SPI Channels=1, Number of Timers/Counters=5, Oscillator Type=Internal, Packaging=Rail/Tube, Peripherals=POR,PWM,WDT,DMA, Pricing 1="1=0.97500, 25=0.85400, 50=0.75500, 100=0.65600, 250=0.61800, 500=0.58000, 1000=0.52500, 2500=0.46900 (GBP)", Pricing 3="100=0.43900, 250=0.38800, 1000=0.37300 (GBP)", Radiation Hardening=No, RAM Size=4KB, REACH SVHC="No SVHC", RoHS=Yes, Stock 1=1196, Stock 3=48, Supplier 1=Farnell, Supplier 2=Digi-Key, Supplier 3=RSComponents, Supplier Part Number 2=497-14044-5-ND, Supplier Part Number 3=7925925P, Watchdog Timer=Yes, Width=4.5mm
U3: "Humidity Temperature Sensor 0 ~ 100% RH I²C ±2% RH 8s Surface Mount", Case/Package=DFN, Manufacturer=Sensirion, Max Operating Temperature=125°C, Min Operating Temperature=-40°C, Supplier Part Number 1=1649-1100-1-ND, Accuracy=2%, Category="Sensors Transducers", Checked By=?, ComponentLink1Description="Online datasheet", ComponentLink1URL=https://media.digikey.com/pdf/Data%20Sheets/Sensirion%20PDFs/HT_DS_SHTC3_D1.pdf, Created By="D. Gakure", Manufacturer Part Number=SHTC3, Mount="Surface Mount", Output Type=I2C, Packaging="Tape and Reel", Pricing 1="1=2.98000, 5=2.76200, 10=2.29500, 25=1.91240, 50=1.70000, 100=1.61500, 500=1.36000, 1000=1.27500 (USD)", Pricing 2="1=2.44000, 10=2.03000, 50=1.50000, 100=1.43000, 1000=1.13000, 10000=0.93700 (USD)", Pricing 3="1=2.94000, 25=1.98000, 50=1.84000, 250=1.59000, 500=1.56000 (GBP)", Pricing 4="2500=1.13700 (USD)", Response Time=8s, RoHS=No, Sensor Type=Temperature, Stock 1=10507, Stock 2=13209, Stock 3=3479, Stock 4=1085, Supplier 1=Digi-Key, Supplier 2=Mouser, Supplier 3=Farnell, Supplier 4=RSComponents, Supplier Part Number 2=403-SHTC3, Supplier Part Number 3=3106918, Supplier Part Number 4=1950668

## Via types
v1: diameter 0.6, hole 0.3, Top Layer to Bottom Layer, tented both sides, 12 vias

## Nets (pads, with @x,y where several pads share a name; then routed paths per layer and width w, separated by ;. In a path a pad name is that pad's centre, name@x,y a point inside that pad or via, vN(x,y) a via of type N, cw(c..) or ccw(c..) an arc to the next point about the centre after c; other vN are vias at no path point)
3V3: C3.2 C4.2 C5.2 D1.2 D6.1 J6.1 R2.1 R3.1 U1.5 U2.5 U2.16 U3.1 | length 26
  Top Layer w0.5: C4.2 C4.2@-3.925,15.3 ; U3.1@-2.85,15.293 -3.771,15.293 -3.779,15.3 C4.2@-3.925,15.3 ; v1@-0.357,15.013 0.4,15.77 R3.1 ; v1(-0.357,15.04) -0.384,15.04 -0.619,14.805 -1.2,14.805 -1.83,14.175 -2.5,14.175 -2.6,14.075 U1.5 -3.756,13.925 C3.2 -3.881,15.256 C4.2@-3.925,15.3 ; v1(-0.341,9.572) -0.322,9.553 0.385,9.553 0.85,9.088 0.85,6.25 0.775,6.175 D6.1 ; 0.24,9.553 1.124,10.437 1.124,10.525 1.174,10.575 D1.2@1.285,10.575 ; R3.1@0.419,16.091 0.419,17.023 0.425,17.029 R2.1@0.425,17.194 ; R2.1 0.425,17.357 0.798,17.73 2.72,17.73 J6.1
  Bottom Layer w0.3: U2.5 U2.5@-0.337,8.287
  Bottom Layer w0.5: v1@-0.354,9.584 -0.354,15.263 -0.275,15.342 C5.2 ; v1(-0.341,9.572) -0.346,9.568 -0.346,8.296 U2.5@-0.337,8.287
GND: C1.1 C2.1 C3.1 C4.1 C5.1 D1.1 D2.2 D3.2 J1.2 J6.3 MH1.1 MH2.1 U1.2 U2.1 U2.15 U3.4 U3.5 | length 58.2
  Top Layer w0.5: C4.1 -3.925,16.3 -3.825,16.2 U3.5@-2.675,16.2 ; C2.1 C3.1 -2.451,13.05 v1(-1.718,12.317) -1.216,12.819 0.832,12.819 1.124,12.526 1.124,12.525 1.174,12.475 1.474,12.475 2.494,13.494 ; D2.2 -3.159,5.881 -2.835,6.205 -2.744,6.205 v1(-2.725,6.224) ; U3.5 U3.5@-2.675,16.2 ; MH1.1 MH2.1 -2.775,19.775 U3.4 -2.775,16.3 U3.5@-2.675,16.2 ; 2.529,13.53 2.529,14.527 3.532,15.53 J6.3 ; 2.579,13.714 4.213,12.081 4.213,10.465 4.213,7.711 3.921,7.419 3.891,7.419 3.537,7.065 C1.1 ; D3.2@2.708,5.535 2.708,5.951 3.487,6.731
  Bottom Layer w0.5: v1(-2.725,6.224) -2.708,6.207 -2.257,6.207 0.02,3.93 ; MH2.1 -2.5,16.875 C5.1 -1.275,15.087 -1,14.812 -1,13.062 -1.718,12.344 v1(-1.718,12.317) ; J1.2@0.02,-0.8 0.02,3.93 ; v1(4.213,11.606) 2.208,9.602 2.208,6.192 0.02,4.004 0.02,3.93
  other v1: 0.02,-3.675
JD_DATA: D3.1 FB1.1 J1.1 MH3.1 | length 12.4
  Top Layer w0.25: J1.1@-1.25,-3.425 -1.25,-2.4 -0.461,-1.611 0.479,-1.611 J1.1@1.29,-0.8 ; FB1.1 2.058,6.644 D3.1@2.058,5.535 ; D3.1@2.051,5.528 2.062,5.517 2.062,5.084 2.5,4.646 MH3.1
  Bottom Layer w0.25: J1.1@1.29,-0.8 2.271,0.181 2.271,2.321 MH3.1
JD_DATA_MCU: D1.3 R1.1 U2.8 | length 10.2
  Top Layer w0.25: v1(-1.029,9.975) -0.962,10.042 -0.712,10.042 0.771,11.525 D1.3 3.324,9.998 2.523,9.196 R1.1
  Bottom Layer w0.25: U2.8 -2.3,9.223 -1.615,9.908 -1.096,9.908 v1(-1.029,9.975)
JD_PWR: C2.2 D2.1 J1.3 MH4.1 U1.1 U1.3 | length 25.3
  Top Layer w0.5: U1.1@-2.6,11.375 -2.962,11.013 C2.2 -3.881,5.109 -2.978,4.206 -2.978,3.028 MH4.1 -2.5,2.5 -0.6,0.6 1.503,0.6 2.428,-0.325 2.428,-1.262 1.29,-2.4 J1.3@1.29,-3.675 ; U1.1 -2.5,11.425 -2.5,10.995 -2.155,10.65 -1.145,10.65 -0.8,10.995 -0.8,11.425 U1.3 ; J1.3@-1.25,-0.8 -1.25,0.079 -0.665,0.665
JD_RGB_B: R4.2 U2.14 | length 6.9
  Top Layer w0.25: v1(-3.156,10.24) -3.206,10.189 -3.206,8.481 -2.625,7.9 R4.2
  Bottom Layer w0.25: v1(-3.156,10.24) -3.206,10.291 -3.206,11.606 -1.672,13.141 -1.672,13.803 U2.14@-1.652,13.823
JD_RGB_G: R5.2 U2.12 | length 9.7
  Top Layer w0.25: v1(-2.614,6.971) -2.546,6.971 -2.05,6.475 R5.2
  Bottom Layer w0.25: U2.12@-2.947,14.022 -2.947,12.757 -4.251,11.453 -4.251,7.558 -3.664,6.971 v1(-2.614,6.971)
JD_RGB_R: R6.2 U2.10 | length 5.6
  Top Layer w0.25: v1(-2.614,9.69) -2.547,9.623 -2.28,9.623 -1.526,8.869 -0.782,8.125 R6.2@-0.782,7.357
  Bottom Layer w0.25: U2.10 -3.6,9.535 -3.445,9.69 v1(-2.614,9.69)
NetC1_2: C1.2 FB1.2 R1.2 | length 3.1
  Top Layer w0.15: FB1.2@1.821,8.28 FB1.2 ; R1.2 R1.2@3.669,9.317
  Top Layer w0.25: FB1.2 2.03,8.071 3.507,8.071 C1.2 3.517,8.071 3.517,9.166 R1.2
NetD6_2: D6.2 R6.1 | length 2.7
  Top Layer w0.25: R6.1 0.225,7.325 0.027,7.127 0.027,5.723 0.675,5.075 D6.2
NetD6_3: D6.3 R5.1 | length 1.4
  Top Layer w0.25: R5.1 -2,5.475 -1.6,5.075 D6.3
NetD6_4: D6.4 R4.1 | length 2.1
  Top Layer w0.15: D6.4@-0.8,6.2 D6.4@-0.75,6.25
  Top Layer w0.25: R4.1 -1.625,6.975 -0.85,6.2 D6.4@-0.8,6.2
nRESET: J6.5 U2.4 | length 7.4
  Bottom Layer w0.25: U2.4 0.3,9.449 3.65,12.799 J6.5
SHTC3_SCL: R3.2 U2.17 U3.2 | length 6
  Top Layer w0.2: U3.2 -1.737,15.313 -1.162,15.313 -0.6,15.875 -0.6,15.925 -0.974,16.299 -0.974,16.488 v1(-1.05,16.565)
  Bottom Layer w0.25: v1(-1.05,16.565) 0.03,16.565 0.3,16.295 U2.17
SHTC3_SDA: R2.2 U2.18 U3.3 | length 6.9
  Top Layer w0.25: U3.3 -1.737,17.163 -0.613,17.163 R2.2 v1(-0.575,17.875)
  Bottom Layer w0.25: v1(-0.575,17.875) 0.225,17.875 0.979,17.121 0.979,14.054 U2.18
SWCLK: J6.4 U2.20 | length 1.6
  Bottom Layer w0.25: J6.4 1.974,15.297 2.25,15.021 U2.20
SWDIO: J6.2 U2.19 | length 6.8
  Bottom Layer w0.25: U2.19 1.6,12.863 1.853,12.61 2.495,12.61 2.777,12.892 2.777,15.195 2.779,15.197 2.779,15.863 2.777,15.865 2.777,15.997 J6.2
pads on no net: J1. U1.4 U2.2 U2.3 U2.6 U2.7 U2.9 U2.11 U2.13 U3.

## Silkscreen, mask and mechanical layers (free items; w line width, h text height)
Top Overlay:
  drawing of 2 lines, arcs and shapes, not listed
  text "'.ProjectCodenameID'-'.ProjectRevision'" at -4.4,8.575 h1
Bottom Overlay:
  drawing of 5 lines, arcs and shapes, not listed
  text "Temp &" at 2.55,6.075 h1
  text "humidity" at 2.525,4.625 h1
Dimension:
  the board outline again, w0.05
Route Tool Path:
  circle w0.1: c-2.5,2.55 r2
  circle w0.1: c2.5,2.55 r2
Board Outline:
  the board outline again, w0.2
Top Assy:
  the board outline again, w0.05
Bottom Assy:
  the board outline again, w0.05

## Dimensions
2.47,-6.1 to -2.5,22.123 on Dimension
-5.074,11.3 to 5.073,11.3 on Dimension
-4.574,2.55 to 4.573,2.549 on Dimension
-3.27,-5.3 to 3.27,-5.3 on Dimension

## Text inside footprints (layer, text, board x,y; h text height)
J1: Alignment "board outline  / for 'outie'" at 5.16,-1.114 h1.2 r180; Alignment "board outline  / for 'innie'" at 4.55,1.731 h1.2 r180; Mechanical 9 "Jacdac / cable connector  / body" at -4.801,-10.258 h1.7 r180
MH1: Assembly Notes "5mm dia keepout  / for traces and  / components to  / allow space for  / bushes/standoffs/ / nuts/screw heads" at 5.294,20.939 h0.5; Assembly Notes "board outline can  / be on 2.0mm   / radius if necessary" at 5.294,16.494 h0.5
MH2: Assembly Notes "5mm dia keepout  / for traces and  / components to  / allow space for  / bushes/standoffs/ / nuts/screw heads" at 0.294,20.939 h0.5; Assembly Notes "board outline can  / be on 2.0mm   / radius if necessary" at 0.294,16.494 h0.5
MH3: Assembly Notes "5mm dia keepout  / for traces and  / components to  / allow space for  / bushes/standoffs/ / nuts/screw heads" at 1.611,5.344 h0.5 r90; Assembly Notes "board outline can  / be on 2.0mm   / radius if necessary" at 6.056,5.344 h0.5 r90
MH4: Assembly Notes "board outline can  / be on 2.0mm   / radius if necessary" at 0.294,-1.006 h0.5; Assembly Notes "5mm dia keepout  / for traces and  / components to  / allow space for  / bushes/standoffs/ / nuts/screw heads" at 0.294,3.439 h0.5